# Altium PCB buzzerWithBattery.PcbDoc
Units mil, origin at the board's own origin, x right, y up, seen from the top; angles counter-clockwise.
Board outline 866.14 x 944.88 mil, 2 copper layers (Top Layer, Bottom Layer), stack 65.792 mil thick; 13 components, 11 nets, 43 pads, 8 vias.
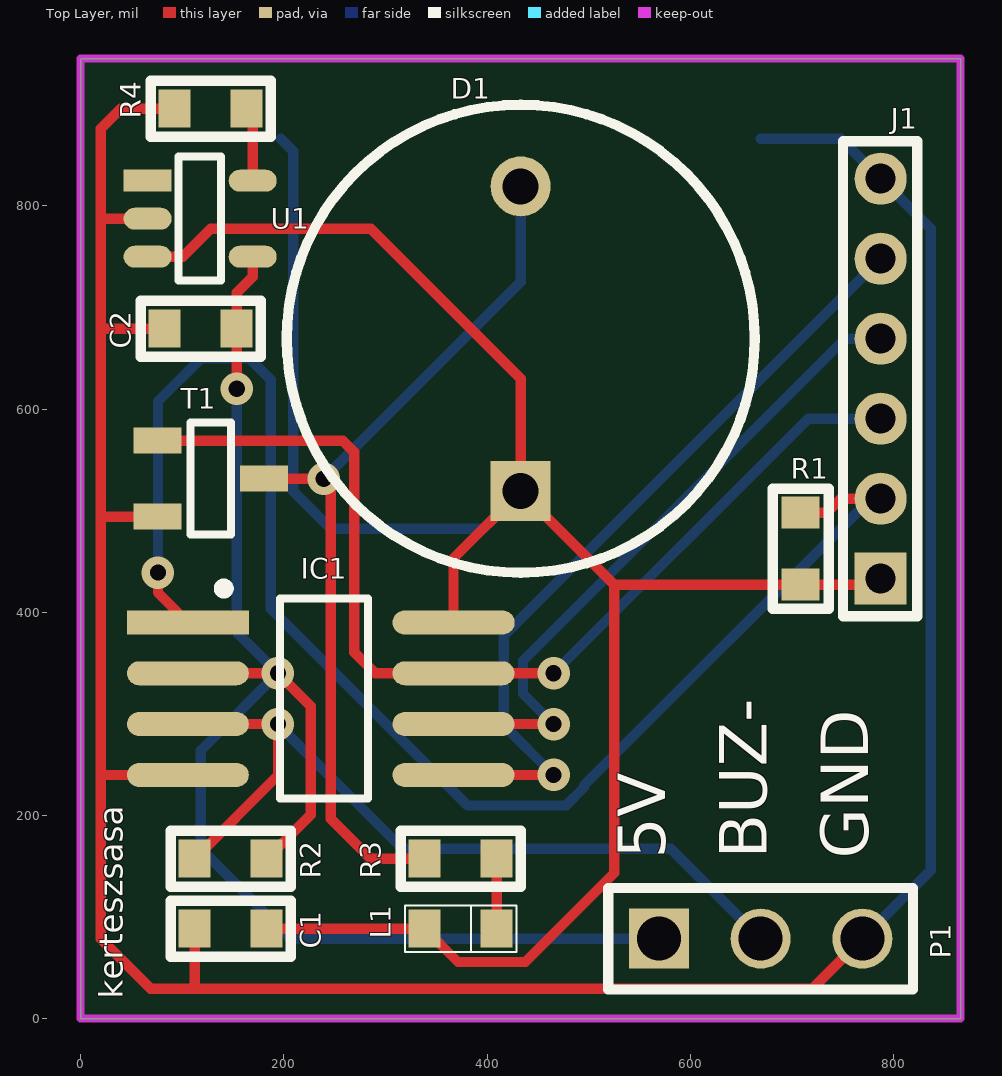
[diagram p0: Top Layer view]
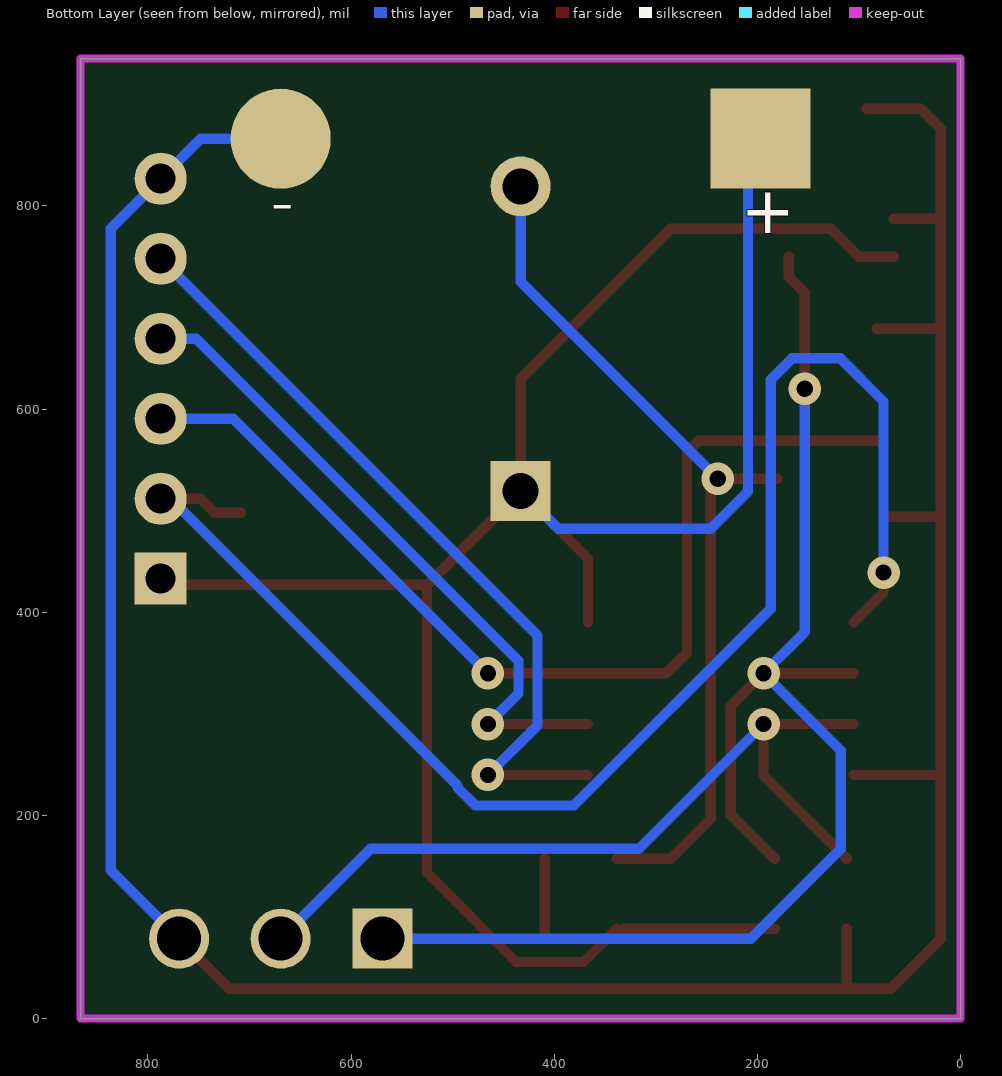
[diagram p1: Bottom Layer view, seen from below]

## Layer stack, top to bottom
Top Solder: solder mask 0.4, Solder Resist, Dk 3.5
Top Layer: signal copper 1.4
Dielectric1: core 62.9921, FR-4, Dk 4.8
Bottom Layer: signal copper 1.4
Bottom Solder: solder mask 0.4, Solder Resist, Dk 3.5

## Board outline
0,0 0,944.88 866.14,944.88 866.14,0

## Design rules (kind name [scope] priority, off if disabled: settings)
Clearance Clearance_to_poly [All vs (InNamedPolygon('Bottom GND'))] p1: gap=20
Clearance Clearance_uc [HasFootprint('LQFP64')] p2: gap=4
Clearance [All] p3: gap=9
HoleSize [All] p1: absolutevalues=TRUE maxlimit=236.22 minlimit=0.98 maxpercent=80.000 minpercent=20.000
MinimumSolderMaskSliver MinimumSolderMaskSliver_uc [HasFootprint('LQFP64')     or    HasFootprint('GATE_SOT363') vs HasFootprint('LQFP64')     or    HasFootprint('GATE_SOT363')] p1: minsoldermaskwidth=0
MinimumSolderMaskSliver [All] p2: minsoldermaskwidth=10
PolygonConnect [All] p1: connectstyle=Relief reliefconductorwidth=10 reliefentries=4 polygonreliefangle="90 Angle" airgapwidth=10
RoutingVias [All] p1: holewidth=16 width=32 viastyle="Through Hole" minholewidth=16 minwidth=32 maxholewidth=28 maxwidth=50
SilkToSilkClearance [All] p1: silktosilkclearance=0
SilkToSolderMaskClearance SilkscreenOverComponentPads [IsPad] p1: minsilkscreentomaskgap=0 clearancetoexposedcopper=TRUE
SolderMaskExpansion [All] p1: expansion=4
Width [All] p1: maxlimit=40 minlimit=8 preferedwidth=10
26 further rules are at their usual default settings.

## Components (designator, comment, footprint, x,y, rotation, side; value= is the part's Value field where it differs from the comment)
C1 "100nF" FP_0603_CAP_080 147.64,88.58 r0 top
C2 "100nF" FP_0603_CAP_080 118.11,679.13 r0 top
D1 "Buzzer" Buzzer_MBS12XXX 433.07,669.29 r90 top
IC1 "ATtiny13" DIGITAL_SOIC8_WSON 236.22,314.96 r0 top
J1 "ISP_MINI" AVR_ISP_MINI 787.4,433.07 r90 top
L1 "BLUE" FP_0603_LED_B 374.02,88.58 r0 top
P1 "Header 1X3" HEADER_2.54MM_M_1x3 669.29,78.74 r0 top
R1 "10k" FP_0603_RES 708.66,462.6 r270 top
R2 "10k" FP_0603_RES 147.64,157.48 r0 top
R3 "330R" FP_0603_RES 374.02,157.48 r180 top
R4 "10k" FP_0603_RES 127.95,895.67 r180 top
T1 "SI2306" FET_SOT23 127.95,531.5 r180 top
U1 "LTC4054ES5-4.2" SUPPLY_SOT23-5 118.11,787.4 r0 top

## Footprints (in the part's own frame and the unit in brackets; to place one, negate y for a bottom-side part, rotate by r counter-clockwise, add the part's x,y. Pads: shape width x height; smd on the part's side, far side on the other; paste and mask are expansions set on the pad)
AVR_ISP_MINI [mm]
  rect 1.3x1.3 hole 0.75: 1(0,0)
  round 1.3 hole 0.75: 2(2,0) 3(4,0) 4(6,0) 5(8,0) 6(10,0)
  silkscreen extent -0.94,-0.91 10.94,0.94
Buzzer_MBS12XXX [mm]
  rect 1.5x1.5 hole 0.9: 1(-3.81,0)
  round 1.5 hole 0.9: 2(3.81,0)
  silkscreen extent -5.85,-5.85 5.85,5.85, body extent -9.45,-6 6,6, height 9.65
DIGITAL_SOIC8_WSON [mm] "MX25L6406-nek megfelelõ"
  rect 3.048x0.6 smd: 1(-3.321,1.905)
  oval 3.048x0.6 smd: 2(-3.321,0.635) 3(-3.321,-0.635) 4(-3.321,-1.905) 5(3.321,-1.905) 6(3.321,-0.635) 7(3.321,0.635)
  oval 3.059x0.6 smd: 8(3.321,1.905)
  silkscreen extent -2.55,-2.5 1.18,2.88, body extent -4.03,-2.73 4.04,2.73, height 2.18
FET_SOT23 [mm] "SOT23-3 tok"
  rect 1.2x0.65 smd: D(-1.327,0) G(1.327,-0.95) S(1.327,0.95)
  silkscreen extent -0.51,-1.4 0.51,1.4, body extent -1.27,-1.46 1.27,1.46, height 0.97
FP_0603_CAP_080 [mm] "0.8mm magas 0603 kapacitás"
  rect 0.8x0.95 smd: 1(-0.9,0) 2(0.9,0)
  silkscreen extent -1.5,-0.7 1.5,0.7, body extent -0.8,-0.4 0.76,0.4, height 0.8
FP_0603_LED_B [mm] "0603 LED"
  rect 0.8x0.95 smd: A(-0.9,0) K(0.9,0)
  silkscreen extent -1.4,-0.58 1.4,0.58, body extent -0.8,-0.4 0.8,0.4, height 0.6
FP_0603_RES [mm] "0603 ellenállás"
  rect 0.8x0.95 smd: 1(-0.9,0) 2(0.9,0)
  silkscreen extent -1.5,-0.7 1.5,0.7, body extent -0.8,-0.4 0.8,0.4, height 0.44
HEADER_2.54MM_M_1x3 [mm] "3×1 tüskesor"
  rect 1.5x1.5 hole 1.1: 1(-2.54,0)
  round 1.5 hole 1.1: 2(0,0) 3(2.54,0)
  silkscreen extent -3.81,-1.27 3.81,1.27, body extent -3.78,-1.27 3.79,1.27, height 8.54
SUPPLY_SOT23-5 [mm] "SOT23, 5-Leads, Body 2.9x1.6mm, Pitch 0.95mm, Lead Span 2.8mm, IPC Medium Density"
  rect 1.2x0.55 smd mask+0.05: 1(-1.327,0.95)
  oval 1.2x0.55 smd mask+0.05: 2(-1.327,0) 3(-1.327,-0.95) 4(1.3,-0.95) 5(1.3,0.95)
  silkscreen extent -0.56,-1.55 0.51,1.55, body extent -1.17,-1.46 1.17,1.46, height 1

## Part data
C1 C2: library part CAP, "Capacitor"
L1: library part LED_B, "Typical LED"
P1: "Header, 3-Pin"
R1 R2 R4: library part Res3, "Resistor"
R3: library part RES, "Resistor"
T1: library part NMOS
U1: "LiPo charger 800mA"

## Free pads (board coordinates)
  rect 98.43x98.43 smd far side: 0(196.85,866.14)
  round 98.43 smd far side: 0(669.29,866.14)

## Via types
v1: diameter 32, hole 16, Top Layer to Bottom Layer, tented both sides, 8 vias

## Nets (pads, with @x,y where several pads share a name; then routed paths per layer and width w, separated by ;. In a path a pad name is that pad's centre, name@x,y a point inside that pad or via, vN(x,y) a via of type N, cw(c..) or ccw(c..) an arc to the next point about the centre after c; other vN are vias at no path point)
5V: C2.2 IC1.2 P1.1 R2.2 U1.4 | length 1427.7
  Top Layer w10: IC1.2 v1(194.05,339.96) 226.38,307.64 226.38,200.79 R2.2 ; v1(153.54,620.08) C2.2 153.54,714.57 169.29,730.32 U1.4
  Bottom Layer w10: v1(153.54,620.08) 153.54,380.47 v1(194.05,339.96) 118.11,264.02 118.11,167.32 206.69,78.74 P1.1
BATT: C1.2 D1.1 IC1.8 J1.1 L1.A pad.0@196.85,866.14 R1.2 U1.3 | length 2382.4
  Top Layer w10: U1.3 100.39,750 127.95,777.56 285.43,777.56 433.07,629.92 D1.1 ; C1.2 331.91,88.58 L1.A@335.25,85.25 ; L1.A 371.28,55.88 437.67,55.88 525.2,143.41 525.2,427.17 ; IC1.8 366.97,453.19 D1.1 ; J1.1 781.5,427.17 R1.2 525.2,427.17 ; D1.1 525.2,427.17
  Bottom Layer w10: pad.0@196.85,866.14 209.25,853.74 209.25,519.07 246.04,482.28 396.06,482.28 D1.1
BUZZER-: IC1.3 P1.2 R2.1 | length 817.7
  Top Layer w10: IC1.3 v1(194.05,289.96) 194.05,239.33 R2.1
  Bottom Layer w10: v1(194.05,289.96) 316.69,167.32 580.71,167.32 P1.2
GND: C1.1 C2.1 IC1.4 J1.6 P1.3 pad.0@669.29,866.14 R4.2 T1.S U1.2 | length 2914.2
  Top Layer w10: U1.2 21.65,787.4 19.68,789.37 ; T1.S 21.65,494.09 19.68,492.13 ; C2.1 19.68,679.13 ; R4.2 39.37,895.67 19.68,875.98 19.68,789.37 ; IC1.4 23.43,239.96 19.68,236.22 ; C1.1 112.2,33.46 108.27,29.53 ; P1.3 720.08,29.53 108.27,29.53 ; 19.68,236.22 19.68,492.13 ; 19.68,236.22 19.68,78.74 68.9,29.53 108.27,29.53 ; 19.68,492.13 19.68,679.13 ; 19.68,679.13 19.68,789.37
  Bottom Layer w10: pad.0@669.29,866.14 748.03,866.14 J1.6 836.61,777.56 836.61,146.06 P1.3
MISO: IC1.6 J1.4 | length 656.6
  Top Layer w10: IC1.6 v1(465.39,289.96)
  Bottom Layer w10: v1(465.39,289.96) 435.39,319.96 435.39,352.39 752.3,669.29 J1.4
MOSI: IC1.5 J1.5 | length 780.5
  Top Layer w10: IC1.5 v1(465.39,239.96)
  Bottom Layer w10: v1(465.39,239.96) 416.39,288.96 416.39,377.02 J1.5
NetD1_2: D1.2 R3.2 T1.D | length 873.4
  Top Layer w10: T1.D v1(239.25,531.5) 246.06,524.68 246.06,196.85 285.43,157.48 R3.2
  Bottom Layer w10: v1(239.25,531.5) 433.07,725.32 D1.2
NetL1_K: L1.K R3.1 | length 75.6
  Top Layer w10: L1.K@409.45,81.91 R3.1
NetR4_1: R4.1 U1.5 | length 73.3
  Top Layer w10: R4.1 169.29,889.76 U1.5
OUT/SCK: IC1.7 J1.3 T1.G | length 1025.6
  Top Layer w10: T1.G 257.87,568.9 269.25,557.52 269.25,360.67 289.96,339.96 IC1.7 v1(465.39,339.96)
  Bottom Layer w10: v1(465.39,339.96) 715.98,590.55 J1.3
RESET: IC1.1 J1.2 R1.1 | length 1483.9
  Top Layer w10: v1(75.94,439.17) 75.94,419.49 IC1.1 ; R1.1 734.25,498.03 748.03,511.81 J1.2
  Bottom Layer w10: v1(75.94,439.17) 75.94,607.44 118.58,650.08 165.97,650.08 187.01,629.04 187.01,403.54 380.59,209.96 477.82,209.96 495.39,227.53 495.39,229.65 777.56,511.81 J1.2
pads on no net: U1.1

## Keep-outs
Keep-Out Layer:
  the board outline again, w7.87

## Silkscreen, mask and mechanical layers (free items; w line width, h text height)
Top Overlay:
  text "5V" at 590.55,157.48 h80 r90
  text "BUZ-" at 690.55,157.48 h80 r90
  text "GND" at 790.55,157.48 h80 r90
  text "kerteszsasa" at 49.21,19.68 h40 r90
Bottom Overlay:
  text "-" at 679.13,767.72 h80
  text "+" at 216.54,757.87 h80